# Altium PCB 存储物柜V1.1.PcbDoc (part 2 of 2)
Units mm, origin at the board's own origin, x right, y up, seen from the top; angles counter-clockwise.
Board outline 525.53 x 267.33 mm, 2 copper layers (Top Layer, Bottom Layer); 194 components, 171 nets, 781 pads, 690 vias.
Unrouted connection lines stored in the file: 2.
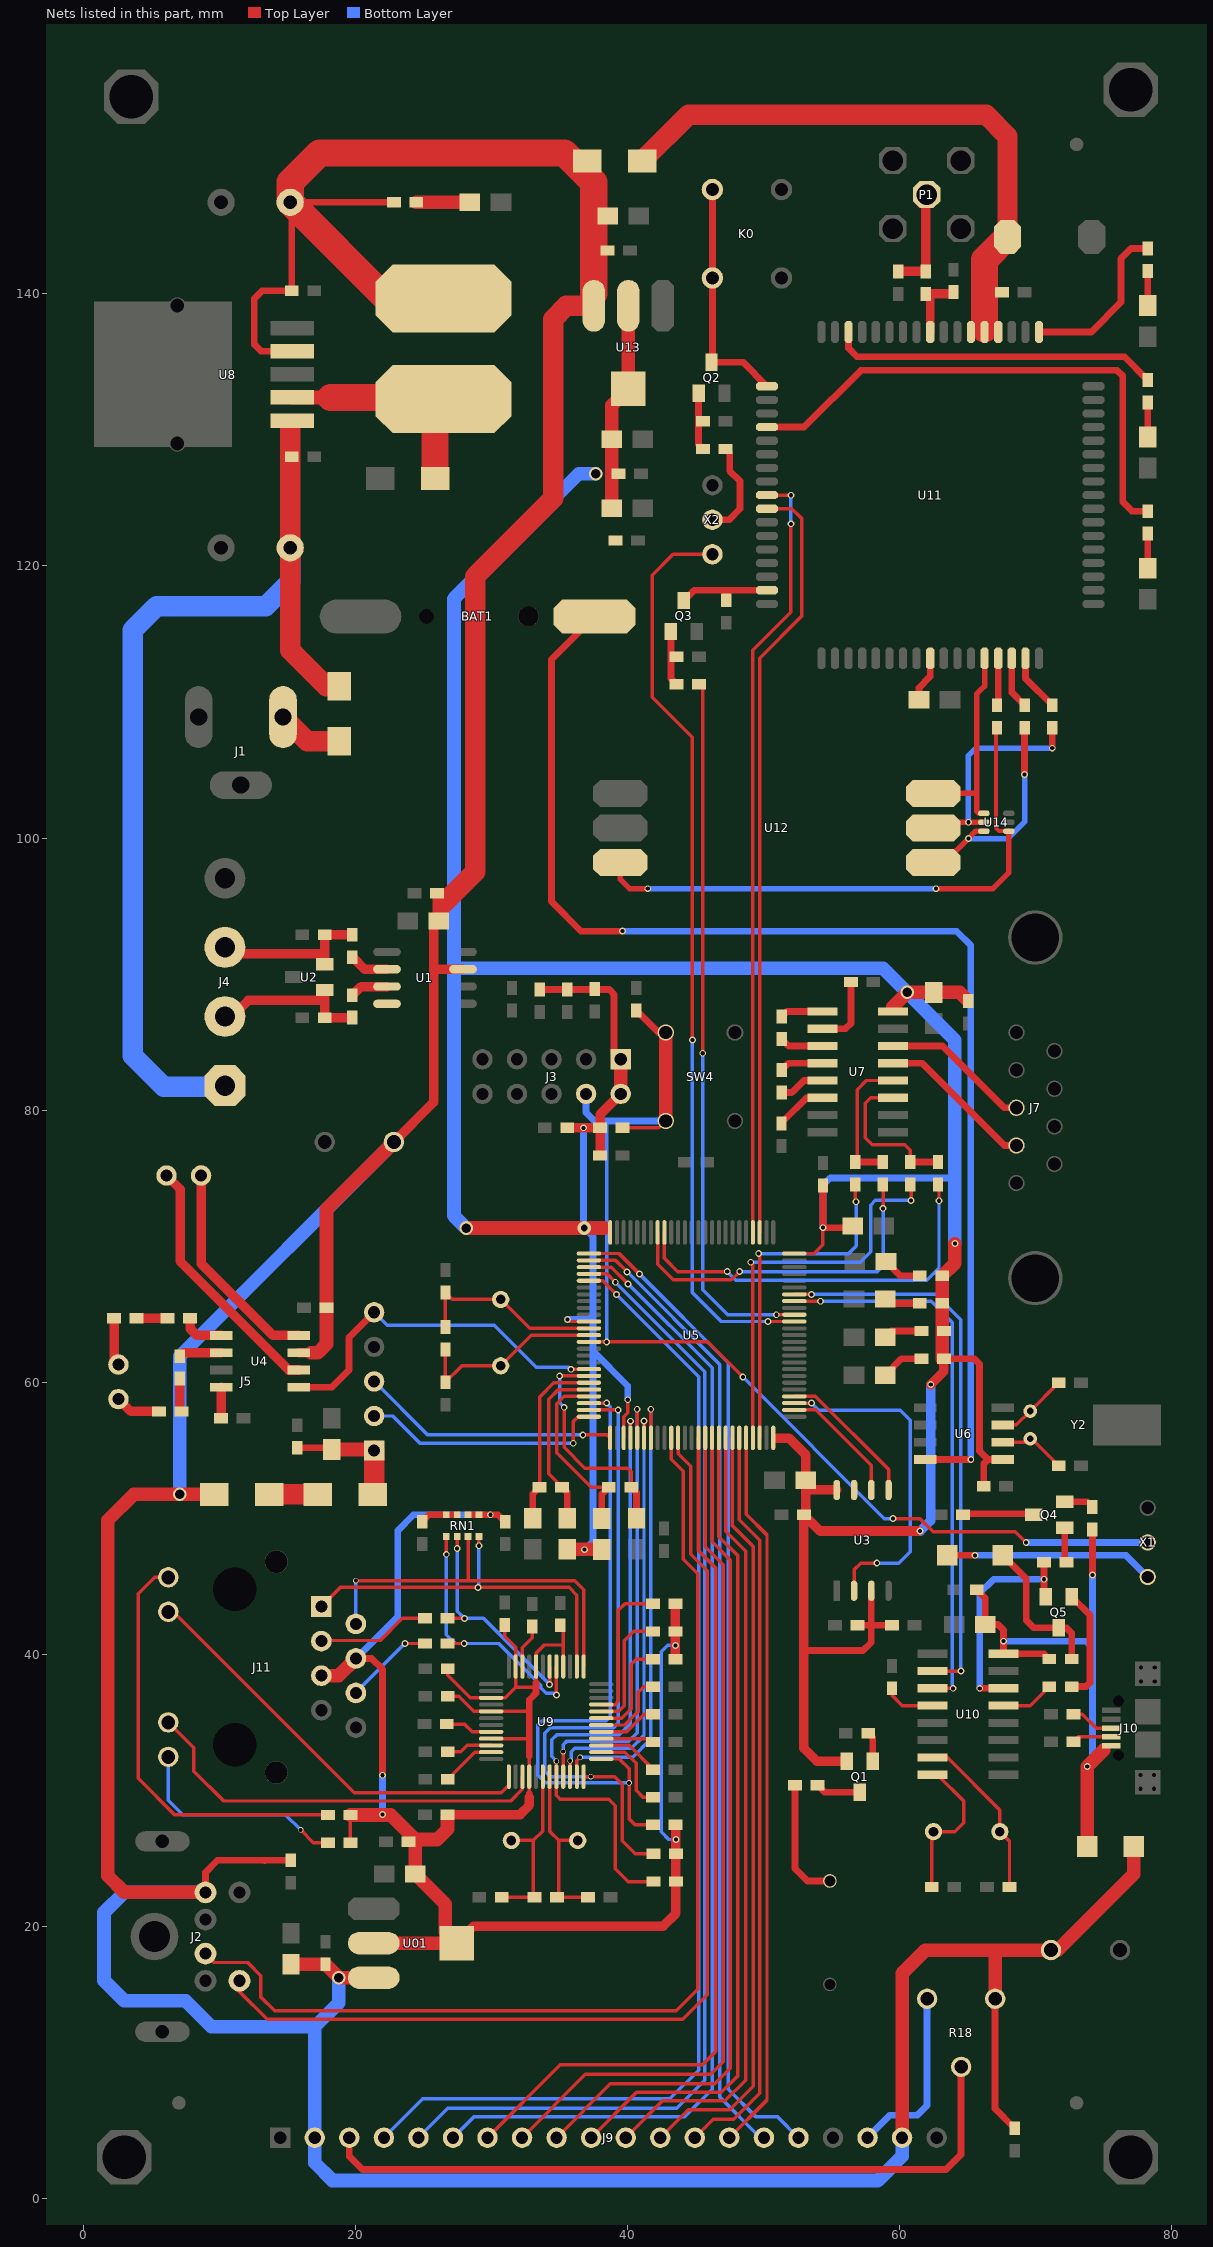
[diagram p2: the nets of this part, all layers, seen from the top]

## Via types
v1: diameter 0.5, hole 0.3, Top Layer to Bottom Layer, tented both sides, 676 vias
v2: diameter 0.4, hole 0.3, Top Layer to Bottom Layer, tented both sides, 8 vias
v3: diameter 1, hole 0.7, Top Layer to Bottom Layer, tented both sides, 5 vias
v4: diameter 1, hole 0.5, Top Layer to Bottom Layer, tented both sides, 1 vias

## Nets (pads, with @x,y where several pads share a name; then routed paths per layer and width w, separated by ;. In a path a pad name is that pad's centre, name@x,y a point inside that pad or via, vN(x,y) a via of type N, cw(c..) or ccw(c..) an arc to the next point about the centre after c; other vN are vias at no path point) (continued)
NET+3.3V: C03.1 C004.1 C04.1 C39.1 C41.1 C42.1 C46.1 C66.1 J11.4 J11.5 R31.1 R33.1 R35.1 R42.1 R46.1 R48.1 R50.1 R51.1 RN1.1 RN1.3 U01.2 U01.4 U9.4 U9.8 U9.11 U9.15 U9.17 U9.21 U9.28 | length 150.5
  Top Layer w0.254: R51.1@19.61,26.14 R50.1@19.61,28.172 ; C41.1@26.772,36.891 27.585,36.891 28.689,35.787 U9.17@29.961,35.787 32.761,35.787 ; C66.1@26.772,38.923 26.772,38.432 28.418,36.787 U9.15@29.961,36.787 30.987,36.787 31.761,37.561 U9.11@31.761,39.087 31.761,40.512 30.963,41.31 C39.1@30.963,42.149 ; U9.21@29.961,33.787 32.761,33.787 ; 31.763,37.56 33.221,37.56 ; 32.761,29.746 U9.28@32.761,30.987 32.761,32.5 ; 33.261,37.9 U9.8@33.261,39.087 33.261,40.061 33.868,40.668 35.261,40.668 ; U9.4@35.261,39.087 35.261,40.668 ; C46.1@35.261,42.091 35.261,40.668
  Top Layer w0.5: J11.4@20.016,39.683 21.178,39.683 21.971,38.89 v1(21.971,31.092) ; RN1.3@28.264,50.244 RN1.1@29.064,50.244 v1(29.9,50.244) 30.48,50.244 C004.1@30.988,49.736 ; 32.761,29.492 32.761,29.746 ; 32.761,32.5 32.761,33.787 32.761,35.787 32.761,36.625 33.261,37.125 33.261,37.9
  Top Layer w0.7: C42.1@26.75,28.2 32.083,28.2 32.761,28.878 32.761,29.492 ; U01.4@27.43,18.747 28.676,19.993 42.61,19.993 43.55,20.932 R48.1@43.55,23.276 R46.1@43.55,25.308 v1(43.55,26.368) R42.1@43.55,27.403 ; R35.1@43.511,39.932 v1(43.511,40.643) R33.1@43.511,41.666 R31.1@43.511,43.698
  Top Layer w1: J11.5@17.476,38.413 18.746,38.413 J11.4@20.016,39.683 ; R50.1@19.61,28.172 22.58,28.172 C04.1@24.214,26.538 ; U01.2@21.334,18.747 U01.4@27.43,18.747 26.594,19.584 26.594,21.618 C03.1@24.384,23.828 24.384,26.368 26,26.368 26.75,27.118 C42.1@26.75,27.968
  Bottom Layer w0.254: v1(43.511,40.643) 42.943,40.643 42.461,40.161 42.461,26.939 43.032,26.368 v1(43.55,26.368) v1@43.603,26.368
  Bottom Layer w0.5: J11.4@20.016,39.683 23.1,42.767 23.1,49.1 24.244,50.244 29.444,50.244 ; v1(21.971,28.197) v1(21.971,31.092)
NET_CS: R48.2 U5.29 U9.32 | length 46.6
  Top Layer w0.254: v2(34.761,32.123) U9.32@34.761,30.987 34.761,29.613 35.053,29.322 38.609,29.322 39.091,28.839 39.091,24.216 40.031,23.276 R48.2@41.899,23.276 R48.2@42.089,23.276 ; U5.29@40.204,55.902 v1(40.204,57.123)
  Bottom Layer w0.254: v2(34.761,32.123) 34.408,32.476 34.408,33.692 34.8,34.084 39.38,34.084 40.196,34.9 ; 40.204,34.9 v1(40.204,57.123)
NET_INT: R46.2 U5.24 U9.36 | length 47.3
  Top Layer w0.254: U9.36@36.761,30.987 v2(37.287,30.987) 39.052,30.987 39.599,30.439 39.599,26.274 40.565,25.308 R46.2@41.899,25.308 R46.2@42.089,25.308 ; U5.24@37.154,57.952 v1(39.3,57.952)
  Bottom Layer w0.254: v2(37.287,30.987) 34.313,30.987 33.9,31.4 33.9,34.192 34.3,34.592 38.958,34.592 39.3,34.934 v1(39.3,57.952)
NET_RST: R42.2 U5.23 U9.37 | length 49.4
  Top Layer w0.254: U5.23@37.154,58.452 v1(38.456,58.452) ; U9.37@38.793,32.287 U9.37@38.061,32.287 39.378,32.287 40.107,31.557 v2(40.107,30.534) 40.107,27.874 40.539,27.442 R42.2@41.86,27.442
  Bottom Layer w0.254: v1(38.456,58.452) 38.71,58.198 38.71,35.385 38.425,35.1 33.7,35.1 33.392,34.792 33.392,31.108 33.966,30.534 v2(40.107,30.534)
NetB1_1: B1.1 R20.1 | length 8.6
  Top Layer w0.5: R20.1@52.299,30.356 52.299,24.234 53.213,23.32 B1.1@54.432,23.32
NetBAT1_1: BAT1.1 U6.8 | length 95.6
  Top Layer w0.5: BAT1.1@37.558,116.284 34.392,113.118 34.392,95.329 36.576,93.145 v1@39.599,93.145 ; U6.8@61.864,54.308 v1(65.227,54.308)
  Bottom Layer w0.5: v1@39.624,93.145 64.186,93.145 65.227,92.103 v1(65.227,54.308)
  other v1: 39.624,93.17
NetC001_1: C001.1 J11.3 | length 8.3
  Top Layer w0.254: J11.3@17.476,40.953 17.523,41 21.8,41 23.424,42.624 C001.1@25.1,42.624
NetC002_1: C002.1 J11.6 | length 6.6
  Top Layer w0.254: v1(23.62,40.78) C002.1@25.1,40.78
  Bottom Layer w0.254: J11.6@20.016,37.143 20.016,37.176 v1(23.62,40.78)
NetC003_1: C003.1 RN1.5 RN1.7 | length 2.8
  Top Layer w0.5: C003.1@24.892,49.736 25.4,50.244 RN1.7@26.664,50.244 RN1.5@27.464,50.244
NetC5_1: C5.1 J4.2 R5.1 U2.1 | length 11.5
  Top Layer w0.7: J4.2@10.85,86.805 12.12,88.075 17.63,88.075 17.73,87.975 ; U2.1@17.73,88.827 17.73,87.975 ; R5.1@19.762,86.795 C5.1@17.73,86.795 17.73,87.975
NetC9_1: C9.1 J4.3 R6.1 U2.2 | length 11.2
  Top Layer w0.7: J4.3@10.85,91.885 11.26,91.475 17.73,91.475 ; U2.2@17.73,90.732 17.73,91.475 ; R6.1@19.762,92.891 C9.1@17.73,92.891 17.73,91.475
NetC13_2: C13.2 C16.2 D1.2 J5.1 | length 8.9
  Top Layer w0.5: C16.2@15.698,55.172 18.111,55.172 C13.2@18.238,55.045
  Top Layer w1: C13.2@18.238,55.045 21.28,55.045 J5.1@21.358,54.967
  Top Layer w1.5: D1.2@21.358,51.829 J5.1@21.358,54.967
NetC14_1: C14.1 L1.2 U5.20 | length 12.9
  Top Layer w0.254: C14.1@33.528,52.276 33.528,58.905 34.575,59.952 U5.20@36.91,59.952
  Top Layer w0.5: L1.2@33.02,49.99 33.02,51.768 C14.1@33.528,52.276
NetC14_2: C14.2 L2.2 U5.21 | length 12.6
  Top Layer w0.254: C14.2@35.179,52.276 34.188,53.267 34.188,58.728 34.913,59.452 U5.21@37.154,59.452
  Top Layer w0.5: C14.2@35.179,52.276 35.56,51.895 L2.2@35.56,49.99
NetC17_2: C17.2 R15.2 | length 2.3
  Top Layer w0.7: C17.2@3.887,64.697 R15.2@6.173,64.697
NetC18_2: C18.2 R16.2 | length 2.5
  Top Layer w0.7: R16.2@7.062,60.252 7.062,57.966 C18.2@7.189,57.839
NetC19_1: C19.1 U4.4 | length 2
  Top Layer w0.7: C19.1@10.11,57.585 U4.4@10.11,59.617
NetC20_1: C20.1 L3.1 U5.22 | length 13.6
  Top Layer w0.254: U5.22@37.154,58.952 35.327,58.952 34.773,58.397 34.773,54.816 37.313,52.276 C20.1@38.608,52.276
  Top Layer w0.5: L3.1@38.1,49.97 38.1,51.768 C20.1@38.608,52.276
NetC20_2: C20.2 L4.2 U5.19 | length 16.8
  Top Layer w0.254: v1@35,60.452 U5.19@37.154,60.452 ; v1(35.331,58.143) 35.331,55.197 36.855,53.673 40.005,53.673 40.259,53.419 C20.2@40.259,52.276
  Top Layer w0.5: C20.2@40.259,52.276 40.64,51.895 L4.2@40.64,49.99
  Bottom Layer w0.254: v1(35,60.455) 35,58.475 v1(35.331,58.143)
NetC25_2: C25.2 U6.2 Y2.2 | length 5.1
  Top Layer w0.254: U6.2@67.564,55.578 69.342,55.578 Y2.2@69.596,55.832 69.701,55.832 C25.2@71.689,53.844
NetC26_2: C26.2 U6.3 Y2.1 | length 5.4
  Top Layer w0.254: U6.3@67.564,56.848 68.58,56.848 Y2.1@69.596,57.864 71.672,59.94 C26.2@71.689,59.94
NetC31_1: C31.1 U7.1 | length 3.1
  Top Layer w0.5: C31.1@51.329,86.871 51.71,87.252 U7.1@54.317,87.252
NetC31_2: C31.2 U7.3 | length 3.2
  Top Layer w0.5: C31.2@51.329,85.22 51.837,84.712 U7.3@54.317,84.712
NetC32_1: C32.1 U7.2 | length 5.3
  Top Layer w0.5: U7.2@54.317,85.982 56.028,85.982 56.409,86.363 C32.1@56.409,89.411
NetC34_1: C34.1 U7.6 | length 3.7
  Top Layer w0.5: C34.1@51.329,79.251 51.481,79.251 53.132,80.902 U7.6@54.317,80.902
NetC37_1: C37.1 U7.5 | length 3.4
  Top Layer w0.5: C37.1@51.329,81.283 52.065,81.283 52.954,82.172 U7.5@54.317,82.172
NetC37_2: C37.2 U7.4 | length 3.2
  Top Layer w0.5: C37.2@51.329,82.934 51.837,83.442 U7.4@54.317,83.442
NetC47_2: C47.2 Q3.3 U11.16 | length 7.7
  Top Layer w0.5: Q3.3@44.335,117.111 44.062,117.384 44.889,118.211 47.3,118.211 ; C47.2@47.244,117.475 47.244,118.155 47.3,118.211 ; U11.16@50.242,118.211 47.3,118.211
NetC48_1: C48.1 P1.1 R34.1 | length 7.7
  Top Layer w0.5: P1.1@61.926,147.247 P1.1@61.982,147.303
  Top Layer w0.7: C48.1@59.894,141.659 R34.1@61.926,141.659 P1.1@61.926,147.247
NetC49_2: C49.2 U9.20 | length 3.5
  Top Layer w0.254: C49.2@26.701,34.859 27.992,34.859 28.564,34.287 U9.20@29.961,34.287
NetC50_1: C50.1 U11.26 | length 3.4
  Top Layer w0.5: C50.1@61.418,110.163 61.418,111.043 62.242,111.867 U11.26@62.242,113.211
NetC51_1: C51.1 R34.2 U11.60 | length 5
  Top Layer w0.6: R34.2@61.926,140.008 62.242,139.692 U11.60@62.242,137.211
  Top Layer w0.7: R34.2@61.926,140.008 63.831,140.008 C51.1@63.958,140.135
NetC52_1: C52.1 U9.22 | length 3.4
  Top Layer w0.254: C52.1@26.772,32.827 27.738,32.827 28.197,33.287 U9.22@29.961,33.287
NetC56_1: C56.1 C57.1 D8.2 U11.55 U11.56 U11.57 | length 43.8
  Top Layer w1.5: D8.2@41.084,149.787 44.472,153.175 66.35,153.175 67.922,151.603 C56.1@67.922,144.199
  Top Layer w2: U11.56@66.242,137.416 66.242,142.519 C56.1@67.922,144.199
NetC59_2: C59.2 U10.8 Y5.1 | length 11.3
  Top Layer w0.254: C59.2@62.357,22.88 62.357,26.817 Y5.1@62.484,26.944 64.044,26.944 64.7,27.6 64.7,29.2 62.765,31.135 U10.8@62.424,31.135
NetC60_2: C60.2 R47.1 U9.30 Y4.1 | length 13.2
  Top Layer w0.254: C60.2@30.735,22.133 R47.1@33.148,22.133 33.072,22.21 33.072,26.299 ; Y4.1@31.446,26.299 33.072,26.299 ; U9.30@33.761,30.987 33.761,26.989 33.072,26.299
NetC61_2: C61.2 R47.2 U9.31 Y4.2 | length 12.9
  Top Layer w0.254: U9.31@34.261,30.987 34.261,26.959 34.922,26.299 ; Y4.2@36.326,26.299 34.922,26.299 ; C61.2@37.085,22.133 R47.2@34.799,22.133 34.922,22.256 34.922,26.299
NetC63_2: C63.2 U10.4 | length 3.8
  Top Layer w0.254: C63.2@59.436,37.485 59.436,36.964 60.185,36.215 U10.4@62.424,36.215
NetC64_1: C64.1 U10.7 Y5.2 | length 12.5
  Top Layer w0.254: U10.7@62.424,32.405 63.495,32.405 67.364,28.536 Y5.2@67.364,26.944 68.072,26.236 C64.1@68.072,22.88
NetD1_1: D1.1 D2.2 | length 3.6
  Top Layer w1.5: D2.2@13.652,51.743 D1.1@17.222,51.743
NetD3_1: D3.1 J1.1 | length 4.9
  Top Layer w1.5: J1.1@14.659,108.893 16.437,107.115 D3.1@18.796,107.115
NetD4_1: D4.1 R25.1 | length 2.5
  Top Layer w0.5: D4.1@78.232,119.84 R25.1@78.232,122.38
NetD5_1: D5.1 R29.1 | length 2.5
  Top Layer w0.5: D5.1@78.232,129.492 R29.1@78.232,132.032
NetD6_2: D6.2 Q5.3 R32.1 | length 11.1
  Top Layer w0.5: D6.2@67.584,47.264 69.3,45.548 69.3,42.5 69.87,41.93 Q5.3@71.691,41.93 72.27,41.93 72.644,41.556 R32.1@72.644,39.644
NetD7_2: D7.2 L5.1 U8.2 | length 17
  Top Layer w1: U8.2@15.338,132.391 18.166,132.391
  Top Layer w2: 18.166,132.391 26.338,132.391 L5.1@26.462,132.267 25.844,131.649 D7.2@25.844,126.675
NetD9_1: D9.1 R44.1 | length 2.5
  Top Layer w0.5: D9.1@78.232,139.144 R44.1@78.232,141.684
NetJ6_1: J6.1 U4.8 | length 16.3
  Top Layer w0.7: J6.1@8.586,75.184 J6.1@8.586,75.619 ; J6.1@8.636,75.184 8.636,68.711 13.92,63.427 U4.8@15.81,63.427
NetJ6_2: J6.2 U4.6 | length 18.8
  Top Layer w0.7: J6.2@6.096,75.184 7.1,74.18 7.1,68.87 9.675,66.294 ; 9.675,66.322 9.675,66.294 ; U4.6@15.81,60.887 15.083,60.887 9.675,66.294
NetJ9_3: J9.3 R18.2 | length 53.7
  Top Layer w0.5: J9.3@19.536,4.448 19.536,3.064 20.5,2.1 63.4,2.1 64.516,3.216 R18.2@64.516,9.652
NetJ9_18: J9.18 R18.3 | length 13.2
  Bottom Layer w0.5: J9.18@57.636,4.448 59.288,6.1 61.3,6.1 62.016,6.816 R18.3@62.016,14.652
NetJ10_2: J10.2 R49.2 | length 2.9
  Top Layer w0.254: R49.2@72.771,33.548 73.137,33.914 J10.2@75.557,33.914
NetJ10_3: J10.3 R52.2 | length 3.2
  Top Layer w0.254: R52.2@72.771,35.58 73.42,35.58 74.436,34.564 J10.3@75.557,34.564
NetJ11_9: J11.9 R50.2 | length 31.7
  Top Layer w0.254: J11.9@6.226,45.643 5.229,45.643 4.013,44.427 4.013,30.864 6.705,28.172 R50.2@17.959,28.172 R50.2@17.603,28.172
NetJ11_10: J11.10 U9.25 | length 31.4
  Top Layer w0.254: J11.10@6.226,43.107 6.593,43.107 19.9,29.8 30.7,29.8 31.261,30.361 U9.25@31.261,30.987
NetJ11_11: J11.11 U9.27 | length 30.7
  Top Layer w0.254: J11.11@6.226,34.979 8.1,33.105 8.1,31.4 10.3,29.2 12.005,29.2 31.4,29.2 32.261,30.061 U9.27@32.261,30.987
NetJ11_12: J11.12 R51.2 | length 16.2
  Top Layer w0.254: v2(15.951,27.079) 16.891,26.14 R51.2@17.959,26.14
  Bottom Layer w0.254: J11.12@6.226,32.443 6.226,29.261 7.29,28.197 14.834,28.197 v2(15.951,27.079)
NetLED1_1: LED1.1 R9.1 | length 3.2
  Top Layer w0.5: LED1.1@58.928,60.5 60.146,61.718 R9.1@61.604,61.718
NetLED2_1: LED2.1 R10.1 | length 2.9
  Top Layer w0.5: LED2.1@58.928,63.3 59.378,63.75 R10.1@61.604,63.75
NetLED3_1: LED3.1 R11.2 | length 2.7
  Top Layer w0.5: LED3.1@58.928,66.1 59.246,65.782 R11.2@61.477,65.782
NetLED4_1: LED4.1 R12.2 | length 2.9
  Top Layer w0.5: LED4.1@58.985,68.872 60.043,67.814 R12.2@61.477,67.814
NetLED5_1: LED5.1 R45.2 | length 3.9
  Top Layer w1: R45.2@24.461,146.739 LED5.1@28.398,146.739
NetQ1_1: Q1.1 R19.1 | length 2.2
  Top Layer w0.5: R19.1@57.683,34.191 58.015,33.859 Q1.1@58.015,32.131
NetQ1_3: Q1.3 R20.2 | length 3.3
  Top Layer w0.5: R20.2@53.95,30.356 54.46,29.845 Q1.3@57.063,29.845
NetQ2_1: Q2.1 R21.2 R22.2 | length 4.2
  Top Layer w0.5: Q2.1@45.212,132.692 45.212,128.934 R21.2@45.543,128.603
NetQ3_1: Q3.1 R23.2 R24.2 | length 4.1
  Top Layer w0.5: Q3.1@43.18,115.184 43.18,111.714 R23.2@43.599,111.295
NetQ4_1: Q4.1 R30.2 | length 2.6
  Top Layer w0.5: Q4.1@72.136,49.296 72.136,46.883 R30.2@72.263,46.756
NetQ4_2: Q4.2 R27.1 | length 2.2
  Top Layer w0.5: Q4.2@72.136,51.201 73.787,51.201 R27.1@74.168,50.82
NetQ4_3: Q4.3 R28.2 | length 5.2
  Top Layer w0.5: R28.2@64.643,50.312 69.786,50.312 Q4.3@69.85,50.249
NetQ5_1: Q5.1 R39.1 | length 8.4
  Top Layer w0.5: R39.1@72.644,37.612 73.712,37.612 74,37.9 74,42.86 Q5.1@72.644,44.216
NetQ5_2: Q5.2 R30.1 U10.14 | length 16.5
  Top Layer w0.5: v1(65.885,37.485) U10.14@67.624,37.485 ; R30.1@70.612,46.756 v1(70.612,45.5) 70.612,44.343 Q5.2@70.739,44.216
  Bottom Layer w0.5: v1(65.885,37.485) 65.885,44.476 66.909,45.5 v1(70.612,45.5)
NetR5_2: R5.2 U1.7 | length 2.8
  Top Layer w0.7: R5.2@19.762,88.446 20.397,89.081 U1.7@22.302,89.081
NetR6_2: R6.2 U1.6 | length 2.9
  Top Layer w0.7: R6.2@19.762,91.24 20.651,90.351 U1.6@22.302,90.351
NetR15_1: R15.1 U4.1 | length 3.3
  Top Layer w0.7: R15.1@7.824,64.697 7.824,63.935 8.332,63.427 U4.1@10.11,63.427
NetR16_1: R16.1 U4.2 | length 3.2
  Top Layer w0.7: R16.1@7.062,61.903 7.316,62.157 U4.2@10.11,62.157
NetR21_1: R21.1 X2.2 | length 7.2
  Top Layer w0.5: X2.2@46.228,123.396 47.447,123.396 48.26,124.209 48.26,126.24 47.5,127 47.5,128.297 R21.1@47.194,128.603
NetR25_2: R25.2 U11.4 | length 39.4
  Top Layer w0.5: U11.4@50.242,130.211 52.967,130.211 57.141,134.385 75.981,134.385 76.403,133.962 76.403,124.691 77.064,124.031 R25.2@78.232,124.031
NetR26_2: R26.2 U9.10 | length 3.2
  Top Layer w0.254: U9.10@32.261,39.087 32.261,40.475 32.995,41.209 R26.2@32.995,42.022
NetR29_2: R29.2 U11.66 | length 24.2
  Top Layer w0.5: U11.66@56.242,137.211 56.242,136.013 56.871,135.385 76.53,135.385 R29.2@78.232,133.683
NetR31_2: R31.2 U9.45 | length 10.8
  Top Layer w0.254: U9.45@38.061,36.287 39.071,36.287 39.32,36.535 39.32,43.215 39.803,43.698 R31.2@41.86,43.698
NetR33_2: R33.2 U9.44 | length 9.7
  Top Layer w0.254: U9.44@38.061,35.787 39.333,35.787 39.752,36.205 39.752,40.98 40.438,41.666 R33.2@41.86,41.666 41.225,41.666
NetR35_2: R35.2 U9.43 | length 7.9
  Top Layer w0.254: U9.43@38.061,35.287 39.57,35.287 40.26,35.976 40.26,39.253 40.641,39.634 R35.2@41.86,39.634 R35.2@41.479,39.634
NetR36_2: R36.2 U9.42 | length 6.2
  Top Layer w0.254: U9.42@38.061,34.787 39.781,34.787 40.387,35.392 40.59,35.595 40.768,35.773 40.768,37.196 41.174,37.602 R36.2@41.86,37.602 R36.2@41.61,37.352
NetR37_2: R37.2 U9.41 | length 5.9
  Top Layer w0.254: 39.587,34.287 U9.41@38.061,34.287 39.942,34.287 41.225,35.57 R37.2@41.86,35.57
NetR38_2: R38.2 U9.40 | length 5.2
  Top Layer w0.254: 39.325,33.787 U9.40@38.061,33.787 41.611,33.787 R38.2@41.86,33.538
NetR39_2: R39.2 U10.13 | length 3.9
  Top Layer w0.254: U10.13@67.624,36.215 69.596,36.215 R39.2@70.993,37.612
NetR40_2: R40.2 U9.39 | length 4.6
  Top Layer w0.254: U9.39@38.061,33.287 40.105,33.287 41.86,31.531 R40.2@41.86,31.506
NetR41_2: R41.2 U9.38 | length 6.3
  Top Layer w0.254: U9.38@38.061,32.787 39.792,32.787 40.615,31.963 40.615,29.982 41.123,29.474 R41.2@41.86,29.474
NetR43_1: R43.1 U9.23 | length 4
  Top Layer w0.254: R43.1@26.772,30.795 28.764,32.787 U9.23@29.961,32.787
NetR44_2: R44.2 U11.52 | length 12.4
  Top Layer w0.5: U11.52@70.242,137.211 74.089,137.211 76.276,139.398 76.276,142.598 77.013,143.335 R44.2@78.232,143.335
NetR53_1: R53.1 U12.1 U14.1 | length 42.3
  Top Layer w0.3: R53.1@67.154,108.111 67.072,108.029 67.072,100.753 67.314,100.511 U14.1@68.022,100.511
  Top Layer w0.4: U12.1@39.466,98.201 39.466,96.959 40.15,96.275 v1(41.478,96.275) ; v1(62.662,96.275) 66.85,96.275 68.022,97.447 U14.1@68.022,100.511 68.022,100.247
  Bottom Layer w0.4: v1(41.478,96.275) v1(62.662,96.275)
NetR54_1: R54.1 U12.5 U14.5 | length 18
  Top Layer w0.4: U12.5@62.466,100.741 U12.5@64.116,100.741 ; U12.5@62.75,101.025 U12.5@62.886,101.161 ; U12.5@62.85,101.125 U12.5@62.886,101.161 ; U14.5@66.193,101.161 v1(65.05,101.161) U12.5@62.886,101.161
  Top Layer w0.5: v1(71.218,106.607) R54.1@71.218,108.111
  Bottom Layer w0.4: v1(65.05,101.161) 65.05,106.05 65.607,106.607 v1(71.218,106.607)
NetR55_1: R55.1 U12.4 U14.6 | length 16.4
  Top Layer w0.4: U12.4@62.466,98.201 63.276,98.201 65.043,99.968 65.586,100.511 U14.6@66.193,100.511
  Top Layer w0.5: v1(69.186,104.675) R55.1@69.186,108.111
  Bottom Layer w0.4: v1(65.05,99.961) 67.961,99.961 69.186,101.186 v1(69.186,104.675) v1@69.186,104.814
OSC_IN: C7.1 R7.1 U5.12 Y1.1 | length 14.2
  Top Layer w0.254: R7.1@26.601,64.046 C7.1@26.601,66.586 27.109,66.078 Y1.1@30.665,66.078 32.791,63.952 U5.12@37.154,63.952
OSC_OUT: C10.1 R7.2 U5.13 Y1.2 | length 14.4
  Top Layer w0.254: R7.2@26.601,62.395 C10.1@26.601,59.982 27.817,61.198 Y1.2@30.665,61.198 32.919,63.452 U5.13@37.154,63.452
PA2_USART2_TX: J5.2 U5.25 | length 18.8
  Top Layer w0.254: J5.2@21.358,57.507 J5.2@21.413,57.452 ; v1(36,55.5) 36,57.1 36.352,57.452 U5.25@37.154,57.452
  Bottom Layer w0.254: J5.2@21.358,57.507 22.734,57.507 24.727,55.514 v1@36,55.514 ; J5.2@21.413,57.452 J5.2@21.661,57.204
PA3_USART2_RX: J5.3 U5.26 | length 19.7
  Top Layer w0.254: v1(36.7,56.111) 38.495,56.111 U5.26@38.704,55.902 U5.26@38.704,56.498
  Bottom Layer w0.254: J5.3@21.358,60.047 25.294,56.111 v1(36.7,56.111)
"PA9 USART1_TX": U5.68 U10.3 | length 40.7
  Top Layer w0.254: U5.68@52.254,65.952 v1@54.178,65.952 ; U10.3@62.424,37.485 v1(63.932,37.485)
  Bottom Layer w0.254: v1(54.178,65.941) 62.306,65.941 63.869,64.378 63.869,37.548 63.904,37.513 v1(63.932,37.485)
"PA10  USART1_RX": U5.69 U10.2 | length 40.9
  Top Layer w0.254: U5.69@52.254,66.452 v1@53.518,66.452 ; U10.2@62.424,38.755 v1(64.5,38.755)
  Bottom Layer w0.254: v1(53.518,66.449) 62.636,66.449 64.5,64.586 v1(64.5,38.755)
"PB6  USART1_TX": R01.2 U5.92 | length 29.2
  Top Layer w0.254: U5.92@42.704,71.002 42.704,69.116 43.695,68.126 v1(47.32,68.126) ; v1(62.89,73.333) R01.2@62.89,74.457
  Bottom Layer w0.254: v1(47.32,68.126) 47.955,67.491 62.001,67.491 62.89,68.38 v1(62.89,73.333)
PB7_USART1_RX: R03.2 U5.93 | length 25.8
  Top Layer w0.254: U5.93@42.204,71.002 42.204,68.67 43.358,67.516 47.625,67.516 v1(48.235,68.126) ; v1(58.776,72.774) R03.2@58.776,74.508
  Bottom Layer w0.254: v1(48.235,68.126) 58.344,68.126 58.776,68.557 v1(58.776,72.774)
"PB10 USART3_TX": R02.2 U5.47 | length 29.8
  Top Layer w0.254: v1(49.047,68.811) 49.204,68.655 U5.47@49.204,55.902 ; R02.2@60.784,74.532 60.833,74.483 v1(60.833,73.358)
  Bottom Layer w0.254: v1(49.047,68.811) 57.099,68.811 57.861,69.573 57.861,73.002 58.217,73.358 v1(60.833,73.358)
PB11_USART3_RX: R04.2 U5.48 | length 25.5
  Top Layer w0.254: v1(49.632,69.446) 49.704,69.374 U5.48@49.704,55.902 ; R04.2@56.72,74.532 56.72,73.331 v1(56.794,73.256)
  Bottom Layer w0.254: v1(49.632,69.446) 56.236,69.446 56.794,70.005 v1(56.794,73.256)
PC0: J9.7 U5.39 | length 65.1
  Top Layer w0.254: J9.7@29.696,4.448 35.048,9.8 45.5,9.8 46.482,10.782 46.482,46.332 45.204,47.61 U5.39@45.204,55.902
PC1: J9.8 U5.40 | length 66.2
  Top Layer w0.254: J9.8@32.236,4.448 36.888,9.1 45.4,9.1 46.1,9.1 47.041,10.041 47.041,26.343 ; U5.40@45.704,55.902 45.704,47.898 47.041,46.561 47.041,26.343 ; 47.041,23.65 47.041,26.343
PC2: J9.9 U5.41 | length 63.8
  Top Layer w0.254: J9.9@34.776,4.448 38.728,8.4 46.4,8.4 47.549,9.549 47.549,23.574 ; U5.41@46.204,55.902 46.204,48.261 47.549,46.917 47.549,23.574 ; 47.549,21.618 47.549,23.574
PC3: J9.10 U5.42 | length 60.2
  Top Layer w0.254: J9.10@37.316,4.448 40.648,7.781 44.7,7.781 46.881,7.781 48.108,9.008 48.108,47.221 46.704,48.625 U5.42@46.704,55.902
PC4: J9.11 U5.43 | length 58.4
  Top Layer w0.254: J9.11@39.856,4.448 42.558,7.15 45.8,7.15 47.15,7.15 48.666,8.666 48.666,47.562 47.204,49.025 U5.43@47.204,55.902
PC5: J9.12 U5.44 | length 56.7
  Top Layer w0.254: J9.12@42.396,4.448 44.448,6.5 47.5,6.5 49.225,8.225 49.225,47.91 47.704,49.431 U5.44@47.704,55.902
PC6: J9.13 U5.45 | length 54.9
  Top Layer w0.254: J9.13@44.936,4.448 46.288,5.8 47.8,5.8 49.708,7.708 49.708,48.385 48.204,49.888 U5.45@48.204,55.902
PC7: J9.14 U5.46 | length 53.2
  Top Layer w0.254: J9.14@47.476,4.448 50.242,7.214 50.242,48.757 48.704,50.295 U5.46@48.704,55.902
"PC10 USART3_TX": U5.78 U11.10 | length 56.6
  Top Layer w0.254: U5.78@49.704,71.002 49.704,113.232 52.781,116.309 52.781,123.498 52.068,124.211 U11.10@50.242,124.211
"PC11 USART3_RX": U5.79 U11.9 | length 57.1
  Top Layer w0.254: 49.196,112.9 49.196,113.796 52,116.6 v1(52,123.1) ; U5.79@49.204,71.002 49.204,112.9 ; U11.9@50.242,125.211 v1@52,125.211
  Bottom Layer w0.254: v1(52,123.1) v1(52,125.2)
PE2: J9.16 U5.1 | length 73.6
  Top Layer w0.254: U5.1@37.154,69.452 39.364,69.452 v1(40.869,67.948)
  Bottom Layer w0.254: v1(40.869,67.948) 47.396,61.42 47.396,8.004 49.4,6 51.004,6 J9.16@52.556,4.448
PE3: J9.15 U5.2 | length 71.1
  Top Layer w0.254: U5.2@37.154,68.952 39.102,68.952 v1(39.954,68.1)
  Bottom Layer w0.254: v1(39.954,68.1) 46.761,61.293 46.761,7.439 49.752,4.448 J9.15@50.016,4.448
PE4: J9.6 U5.3 | length 85.7
  Top Layer w0.254: U5.3@37.154,68.452 38.79,68.452 v1(40.03,67.211)
  Bottom Layer w0.254: J9.6@27.156,4.448 28.708,6 44.2,6 46.203,8.003 46.203,15.5 46.203,61.039 v1(40.03,67.211)
PE5: J9.5 U5.4 | length 86.4
  Top Layer w0.254: U5.4@37.154,67.952 38.477,67.952 v1(39.091,67.338)
  Bottom Layer w0.254: J9.5@24.616,4.448 26.768,6.6 43.6,6.6 45.669,8.669 45.669,15.7 45.669,60.76 v1(39.091,67.338)
PE6: J9.4 U5.5 | length 87.2
  Top Layer w0.254: U5.5@37.154,67.452 38.164,67.452 v1(39.167,66.449)
  Bottom Layer w0.254: J9.4@22.076,4.448 24.928,7.3 43.1,7.3 45.212,9.412 45.212,16.3 45.212,60.404 v1(39.167,66.449)
PS_CLK: J2.5 U5.36 | length 79
  Top Layer w0.254: J2.5@11.458,15.981 11.458,15.189 13.487,13.16 29.718,13.16 ; 29.3,13.16 30.9,13.16 44.06,13.16 45.847,14.947 45.847,20.8 45.847,46.129 44.628,47.348 44.628,53.8 43.704,54.724 U5.36@43.704,55.902
PS_DAT: J2.1 U5.35 | length 80.9
  Top Layer w0.254: J2.1@8.958,17.981 9.613,17.326 12.065,17.326 13.03,16.36 13.03,14.786 14.046,13.77 43.57,13.77 45.161,15.361 45.161,19.358 45.161,45.901 44.094,46.967 44.094,53.444 43.204,54.335 U5.35@43.204,55.902
PWRKEY: K0.1 Q2.3 U11.1 | length 17.6
  Top Layer w0.5: Q2.3@46.165,134.978 Q2.3@46.185,134.978 ; Q2.3@46.178,134.985 Q2.3@46.185,134.978 ; Q2.3@46.228,135.042 K0.1@46.228,141.176 K0.1@46.228,147.676 ; Q2.3@46.276,134.887 Q2.3@46.185,134.978 ; 48.461,134.978 Q2.3@46.185,134.978 ; 48.468,134.985 U11.1@50.242,133.211
PX,Y: U1.8
R\E\A\D\Y/BUSY: J5.5 U4.5 U5.18 | length 26.8
  Top Layer w0.254: v1@35.839,60.952 U5.18@37.154,60.952
  Top Layer w0.5: U4.5@15.81,59.617 18.238,59.617 19.508,60.887 19.508,63.277 J5.5@21.358,65.127
  Bottom Layer w0.254: J5.5@21.358,65.127 22.322,64.163 30.201,64.163 33.011,61.353 33.264,61.1 35.677,61.1 v1(35.839,60.937)
RESET: C21.1 J3.4 R17.1 SW4.1 U5.14 X1.2 | length 82.7
  Top Layer w0.254: U5.14@37.154,62.952 v1(38.456,62.952) 45.89,62.952 v1(48.463,60.379) ; R17.1@39.624,78.692 42.292,78.692 SW4.1@42.8,79.2 ; v1(59.5,49.965) 61.493,49.965 62.458,49 68.5,49 v1(69.3,48.2)
  Top Layer w0.5: C21.1@40.64,87.328 42.268,85.7 SW4.1@42.5,85.7
  Top Layer w1: SW4.1@42.8,79.2 SW4.1@42.8,85.7
  Bottom Layer w0.254: v1(38.456,62.952) 38.456,79.2 ; v1(48.463,60.379) 58.877,49.965 v1(59.5,49.965)
  Bottom Layer w0.5: J3.4@36.944,81.188 36.944,79.823 37.567,79.2 38.456,79.2 42.164,79.2 ; v1(69.3,48.2) 78.22,48.2 X1.2@78.232,48.212
RESET1: D6.1 X1.1 | length 15.4
  Top Layer w0.5: D6.1@63.5,47.264 v1(65.536,47.264)
  Bottom Layer w0.5: v1(65.536,47.264) 76.64,47.264 X1.1@78.232,45.672
RXN: C002.2 RN1.8 U9.5 | length 20.6
  Top Layer w0.254: v1(26.664,47.336) RN1.8@26.664,48.644 ; C002.2@26.751,40.78 v1(27.98,40.78) ; v1(34.761,37) U9.5@34.761,39.087
  Bottom Layer w0.254: v1(26.664,47.336) 26.664,41.436 27.32,40.78 v1(27.98,40.78) 30.52,40.78 33.6,37.7 33.6,37.53 34,37.13 34.631,37.13 v1(34.761,37)
RXP: C001.2 RN1.6 U9.6 | length 17.1
  Top Layer w0.254: C001.2@26.751,42.624 v1(28,42.624) ; v1(27.464,47.764) RN1.6@27.464,48.644 ; v1(34.261,37.761) U9.6@34.261,39.087
  Bottom Layer w0.254: v1(27.464,47.764) 27.464,43.16 v1(28,42.624) 29.399,42.624 v1(34.261,37.761)
SIM900_RST: R23.1 U5.66 | length 52.5
  Top Layer w0.254: v1(45.517,84.178) R23.1@45.517,111.028 ; v1(50.927,64.952) U5.66@52.254,64.952 ; R23.1@45.517,111.028 R23.1@45.25,111.295 R23.1@45.517,111.028
  Bottom Layer w0.254: v1(45.517,84.178) 45.517,66.779 47.344,64.952 v1(50.927,64.952)
SIM_CLK: R55.2 U11.32 | length 3.8
  Top Layer w0.5: U11.32@68.242,113.211 68.242,110.706 R55.2@69.186,109.762
SIM_DATA: R53.2 U11.31 | length 3.5
  Top Layer w0.5: R53.2@67.154,109.762 67.242,109.85 U11.31@67.242,113.211
SIM_PWRKEY: U5.65 X2.1 | length 67.4
  Top Layer w0.254: v1(44.755,85.144) 44.755,107.4 41.808,110.346 41.808,119.332 43.332,120.856 X2.1@46.228,120.856 ; v1(50.317,64.452) U5.65@52.254,64.452
  Bottom Layer w0.254: v1(44.755,85.144) 44.755,66.586 46.888,64.452 v1(50.317,64.452)
SIM_RST: R54.2 U11.33 | length 4.3
  Top Layer w0.5: U11.33@69.242,113.211 69.242,111.738 R54.2@71.218,109.762
SIM_VDD: U11.30 U12.6 U14.4 | length 15.4
  Top Layer w0.4: U12.6@62.52,103.335 U12.6@62.466,103.281 65.644,103.281 ; U14.4@66.193,101.815 U14.4@66.193,101.811 65.814,101.811 65.65,101.975 65.65,110.575 66.242,111.167 U11.30@66.242,113.211
SPI1_MISO: U5.31 U9.34 | length 32
  Top Layer w0.254: U9.34@35.761,30.987 v2(35.761,32.159) ; U5.31@41.204,55.902 v1@41.204,57.122
  Bottom Layer w0.254: v2(35.761,32.159) 35.834,32.232 35.842,32.24 35.842,32.81 36.1,33.068 40.253,33.068 41.199,34.013 v1(41.199,57.127)
SPI1_MOSI: U5.32 U9.35 | length 33.6
  Top Layer w0.254: U9.35@36.261,30.987 36.261,32.161 v2(36.5,32.4) ; U5.32@41.704,55.902 v1@41.704,58
  Bottom Layer w0.254: v2@36.5,32.423 40.37,32.423 41.707,33.759 v1@41.707,58
  other v1: 41.7,58
SPI1_SCK: U5.30 U9.33 | length 34
  Top Layer w0.254: U9.33@35.261,30.987 v2(35.261,32.826) ; U5.30@40.704,55.902 v1@40.704,58
  Bottom Layer w0.254: v2(35.261,32.826) 35.261,33.337 35.5,33.576 40.043,33.576 40.333,33.867 ; 40.337,33.863 40.704,34.23 v1@40.704,58
  other v1: 40.7,58
SPI2_MISO: U3.2 U5.53 | length 25.7
  Top Layer w0.254: U5.53@52.254,58.452 v1(53.514,58.452) ; 56.642,45.418 U3.2@56.642,44.656 56.642,46.205 57.125,46.688 v1(58.318,46.688)
  Bottom Layer w0.254: v1(53.514,58.452) 54.051,57.915 60.046,57.915 60.782,57.178 60.782,47.526 59.944,46.688 v1(58.318,46.688)
SPI2_MOSI: U3.5 U5.54 | length 10.7
  Top Layer w0.254: U5.54@52.254,58.952 53.801,58.952 59.182,53.571 U3.5@59.182,52.066
SPI2_SCK: U3.6 U5.52 | length 9.2
  Top Layer w0.254: U5.52@52.254,57.952 53.836,57.952 57.912,53.876 U3.6@57.912,52.066
SPK+: C17.1 J5.6 | length 3.5
  Top Layer w0.7: C17.1@2.236,64.697 2.236,61.609 J5.6@2.558,61.287
SPK-: C18.1 J5.7 | length 3.4
  Top Layer w0.7: J5.7@2.558,58.747 3.466,57.839 C18.1@5.538,57.839
TM_RXD: J7.2 U7.13 | length 11.6
  Top Layer w0.5: U7.13@59.517,83.442 61.647,83.442 67.692,77.397 J7.2@68.58,77.397
TM_TXD: J7.3 U7.14 | length 10.9
  Top Layer w0.5: U7.14@59.517,84.712 63.145,84.712 67.692,80.165 J7.3@68.58,80.165
TXN: J11.2 RN1.4 U9.1 | length 29.1
  Top Layer w0.254: v2(20.016,45.4) 36.1,45.4 36.761,44.739 U9.1@36.761,39.087 ; 28.264,45.4 RN1.4@28.264,48.644
  Bottom Layer w0.254: J11.2@20.016,42.223 v2(20.016,45.4)
TXP: J11.1 RN1.2 U9.2 | length 28.6
  Top Layer w0.254: J11.1@17.476,43.493 18.883,44.9 v1(29,44.9) 35.7,44.9 36.261,44.339 U9.2@36.261,39.087 ; v1(29.064,47.964) RN1.2@29.064,48.644
  Bottom Layer w0.254: v1(29,44.9) 29.064,44.964 v1(29.064,47.964)
USART_RX: R03.1 R04.1 U7.12 | length 11
  Top Layer w0.254: R04.1@56.496,76.183 R04.1@56.72,76.183 R04.1@56.871,76.333 ; R04.1@56.871,75.876 56.871,81.5 57.543,82.172 U7.12@59.517,82.172
  Top Layer w0.5: R04.1@56.72,76.183 R03.1@58.752,76.183
USART_TX: R01.1 R02.1 U7.11 | length 11.3
  Top Layer w0.254: U7.11@59.517,80.902 57.873,80.902 57.471,80.5 57.471,77.965 57.988,77.447 60.376,77.447 60.784,77.039 R02.1@60.784,76.183
  Top Layer w0.5: R02.1@60.784,76.183 R01.1@62.816,76.183
USB+5V: C54.2 C55.2 J10.1 R00.2 R27.2 R32.2 U10.16 | length 41.5
  Top Layer w0.5: C55.2@65.659,44.724 66.294,44.089 C54.2@66.294,42.184 67.217,42.184 67.624,41.777 v1(67.624,40.948) U10.16@67.624,40.025 70.612,40.025 R32.2@70.993,39.644 ; v1(74.168,45.824) R27.2@74.168,49.169
  Top Layer w1: R00.2@73.787,25.86 v1(73.787,31.727) 75.006,32.947
  Bottom Layer w0.5: v1(67.624,40.948) 73.711,40.948 74.143,40.516 ; v1(73.787,31.727) 74.168,32.108 v1(74.168,45.824)
VCC+3.3V: C4.2 C6.2 C8.2 C11.2 C12.2 C15.1 C22.1 C33.2 C35.2 C36.2 C67.1 C68.1 C69.1 J3.1 J3.2 L2.1 L3.2 Q1.2 R1.1 R2.1 R3.1 R9.2 R10.2 R11.1 R12.1 R14.1 R17.2 R58.1 U3.3 U3.7 U3.8 U5.11 U5.28 U5.50 U5.75 U5.100 U6.1 U7.16 U13.2 U13.4 | length 321.1
  Top Layer w0.254: v1@35.728,64.452 U5.11@37.154,64.452 ; 35.941,71.002 v4@36.805,71.002 ; L3.2@38.08,47.704 L3.2@38.1,47.684 ; 38.278,71.002 U5.100@38.704,71.002 ; U5.28@39.704,55.902 39.704,57.436 40.005,57.737 v1(40.005,58.7) ; U5.75@52.254,69.452 53.727,69.452 54.356,70.081 v1(54.356,71.351)
  Top Layer w0.5: R3.1@33.528,88.852 R2.1@35.56,88.852 R1.1@37.541,88.852 ; R1.1@37.592,88.903 R1.1@37.541,88.852 ; J3.1@39.484,83.728 39,84.212 39,88.5 38.648,88.852 R1.1@37.541,88.852 ; 52.959,40.262 57.302,40.262 57.912,40.871 57.912,42.116 ; C12.2@54.356,74.45 v1(54.356,71.351) 56.413,71.351 C6.2@56.54,71.478 ; R58.1@56.896,42.116 57.912,42.116 ; U3.3@57.912,44.656 57.912,42.116 ; C22.1@59.436,42.116 57.912,42.116 ; R9.2@63.255,61.718 65.462,61.718 65.862,61.318 65.862,54.943 66.497,54.308 ; C33.2@66.173,52.348 66.173,53.984 66.497,54.308 ; U6.1@67.564,54.308 66.497,54.308
  Top Layer w0.7: R14.1@35.56,78.692 v1(36.754,78.692) R17.2@37.973,78.692 ; C11.2@37.973,76.66 R17.2@37.973,78.692 ; J3.2@39.484,81.188 37.973,79.677 R17.2@37.973,78.692 ; 50.978,55.857 51.892,55.857 53.086,54.664 C4.2@53.086,52.784 ; U3.8@55.372,52.066 53.086,52.066 53.086,50.371 C8.2@52.959,50.244 ; Q1.2@56.11,32.131 53.901,32.131 52.959,33.074 52.959,40.262 C8.2@52.959,50.244 ; v1@61.358,49.05 54.153,49.05 C8.2@52.959,50.244 ; v1(62.281,59.82) 63.255,60.794 R9.2@63.255,61.718
  Top Layer w1: v3(28.118,71.326) v4(36.805,71.326) 38.278,71.326 ; L2.1@35.56,47.704 L3.2@38.08,47.704 ; C67.1@38.822,124.247 C69.1@38.822,129.327 38.822,131.805 U13.4@40.049,133.033 U13.2@40.049,139.129 ; J3.2@39.484,81.188 J3.1@39.484,83.728 ; 59.482,87.582 v3(60.549,88.649) C35.2@62.505,88.649 64.41,88.649 C36.2@64.892,88.167 ; R9.2@63.128,61.718 R11.1@63.128,65.782 R12.1@63.128,67.814 64.059,68.745 v1(64.059,70.183)
  Bottom Layer w0.5: v1(35.573,64.608) 37.198,64.608 37.44,64.849 ; v4@36.754,71.377 v1(36.754,78.692) ; v4(36.805,71.326) 37.44,70.691 37.44,64.849 ; v1(36.83,47.679) 37.44,48.288 37.44,62.284 ; 37.44,65.281 37.44,64.849 ; v1(40.005,58.7) 40.005,59.718 37.44,62.284 ; v1(54.356,71.351) 54.356,74.476 54.889,75.009 64.033,75.009 ; 37.44,62.284 37.44,64.849
  Bottom Layer w0.7: v1@61.513,49.05 62.281,49.818 v1(62.281,59.82)
  Bottom Layer w1: 27.305,90.427 58.771,90.427 v3(60.549,88.649) 64.059,85.139 v1(64.059,70.183) ; v3(28.118,71.326) 27.229,72.215 27.229,117.605 36.398,126.774 v3(37.643,126.774)
  other v1: 61.5,49.05
VCC+5V: C01.1 C1.2 C02.1 C2.2 C3.1 C23.1 C24.2 C27.1 C30.2 C53.1 C58.2 C62.1 C65.1 D2.1 D8.1 J2.4 J9.2 J9.19 L5.2 R00.1 R18.1 R45.1 U1.3 U01.3 U4.7 U8.4 U13.3 | length 389.5
  Top Layer w0.5: J2.4@8.958,22.481 8.958,23.958 9.844,24.844 13.335,24.844 ; 13.31,24.819 13.335,24.844 ; C3.1@15.24,24.844 13.335,24.844 ; U8.4@15.338,135.791 13.034,135.791 12.55,136.275 12.55,139.675 13.106,140.231 C58.2@15.303,140.231 15.303,146.626 C53.1@15.19,146.739 R45.1@22.81,146.739 ; R18.1@67.016,14.652 67.016,6.579 C30.2@68.456,5.139
  Top Layer w0.7: U4.7@15.81,62.157 16.714,62.157 ; C23.1@22.81,77.651 25.73,80.571 25.73,93.525 C1.2@26.112,93.907 25.985,94.034 C2.2@25.985,95.939 ; 25.73,90.351 U1.3@27.89,90.351
  Top Layer w1: J2.4@8.958,22.481 3,22.481 1.778,23.703 1.778,49.838 3.683,51.743 v3(7.062,51.743) D2.1@9.602,51.743 ; C01.1@15.24,17.199 C02.1@17.78,17.199 v3(18.771,16.208) U01.3@21.334,16.208 ; 16.714,62.157 17.222,62.157 17.857,62.792 C24.2@17.857,65.459 17.857,72.698 C23.1@22.81,77.651 ; J9.19@60.176,4.448 60.176,16.516 61.9,18.24 C27.1@71.12,18.24 71.628,18.24 77.216,23.828 R00.1@77.216,25.86 ; R18.1@67.016,14.652 67.016,18.056
  Top Layer w1.5: 26.441,95.177 28.778,97.513 28.778,119.23 34.519,124.971 34.519,138.153 35.494,139.129 U13.3@37.509,139.129
  Top Layer w2: C53.1@15.19,146.739 15.19,148.215 17.35,150.375 35.35,150.375 37.509,148.216 U13.3@37.509,140.035 ; C53.1@15.303,146.626 22.262,139.667 L5.2@26.462,139.667
  Bottom Layer w1: v3(7.062,51.743) 7.062,61.903 C23.1@22.81,77.651 ; J2.4@8.958,22.481 2.981,22.481 1.5,21 1.5,16 3,14.5 7.5,14.5 9.404,12.596 16.996,12.596 ; v3(18.771,16.208) 18.771,14.371 16.996,12.596 ; J9.19@60.176,4.448 60.176,3.076 58.4,1.3 18.3,1.3 16.996,2.604 J9.2@16.996,4.448 16.996,12.596
VCC+12V: C43.1 C45.2 D3.2 J4.1 U8.1 | length 75.7
  Top Layer w1.5: C43.1@15.19,121.339 15.19,113.81 17.835,111.165 D3.2@18.796,111.165 ; C43.1@15.19,121.975 U8.1@15.19,130.375
  Bottom Layer w1.5: J4.1@10.85,81.725 5.882,81.725 3.607,84.001 3.607,115.293 5.359,117.046 13.386,117.046 15.19,118.85 C43.1@15.19,121.339
pads on no net: BAT1.0 J2.2 J2.6 J2.7 J2.9 J2.S J3.8 J7.1 J7.4 J7.6 J7.7 J7.8 J7.9 J9.17 J10.0@76.082,32.564 J10.0@76.082,36.564 J10.0@78.232,33.364 J10.0@78.232,35.764 J10.4 J11.7 J11.8 U1.5 U5.6 U5.7 U5.8 U5.9 U5.15 U5.16 U5.17 U5.33 U5.34 U5.38 U5.55 U5.56 U5.67 U5.70 U5.71 U5.73 U5.80 U5.81 U5.82 U5.83 U5.84 U5.85 U5.86 U5.87 U5.88 U5.91 U5.97 U5.98 U7.7 U7.8 U7.9 U7.10 U9.7 U9.12 U9.13 U9.18 U9.24 U9.26 U9.46 U9.47 U10.9 U10.10 U10.11 U10.12 U10.15 U11.2 U11.3 U11.5 U11.6 U11.7 U11.8 U11.11 U11.12 U11.13 U11.14 U11.15 U11.17 U11.19 U11.20 U11.21 U11.22 U11.23 U11.24 U11.25 U11.27 U11.28 U11.34 U11.35 U11.36 U11.37 U11.38 U11.40 U11.41 U11.42 U11.43 U11.44 U11.47 U11.48 U11.49 U11.50 U11.51 U11.67 U11.68 U12.2 U14.3 X1.3 X2.3

## Polygon pours and split planes (outlines as drawn)
GND on Bottom Layer "Top Layer-No Net" (solid, remove dead copper, pour order 1000): 2,157 1,156 1,2 2,1 6,1 78,1 79,2 79,5 79,156 78,157
GND on Top Layer "Top Layer-No Net" (solid, remove dead copper, pour order 1001): 2,157 1,156 1,2 2,1 7,1 78,1 79,2 79,5 79,156 78,157

## Other copper
Top Layer:
  rectangle net VCC+3.3V: 38.633,121.491 39.717,123.307
  rectangle net VCC+3.3V: 36.83,130.875 43.35,136.275
  rectangle net VCC+3.3V: 36.817,123.307 39.717,132.888
  region net VCC+3.3V: 39.05,129.875 40.05,130.875 39.45,131.475 38.45,130.475
  rectangle net VCC+3.3V: 55.194,51.412 56.794,52.682

## Silkscreen, mask and mechanical layers (free items; w line width, h text height)
Top Overlay:
  circle w0.254: c23.717,29.5 r0.2
  circle w0.254: c5.6,27.6 r0.2
  rectangle: 43.663,119.789 44.704,123.879
  rectangle: 75.667,44.605 76.708,48.695
  lines w0.1: 13.4,29.3 13.4,28.8 ; 13.8,28.8 13.4,28.8 ; 14.5,29.7 14.3,29.7 ; 22.7,30.4 23.3,30.4 ; 23.3,29.8 23.3,30.4 ; 23.7,30.1 23.7,39.7 ; 74.092,34.699 74.092,40.338 ; 74.854,40.338 74.854,39.525 ; 75.692,39.525 74.854,39.525 ; 76.225,40.025 76.225,43.411 ; 76.225,40.897 74.854,39.525 ; 13.4,28.8 14.3,29.7 ; 14.3,29.7 14.902,29.7 15.494,29.7 22.6,29.7 23.3,30.4 ; 73.3,97.8 73.8,97.3 77.3,97.3 77.8,97.8 77.8,111.5 77.3,112 73.8,112 73.3,111.5 73.3,97.8
  lines w0.15: 6.2,27.5 13,27.5
  lines w1: 29.2,59.8 29.2,67.3 ; 30.1,24.9 37.6,24.9 ; 30.1,27.7 37.6,27.7 ; 32.2,59.8 32.2,67.3 ; 61.1,28.4 68.6,28.4 ; 61.2,25.6 68.7,25.6
  text "POWER" at 46.406,149.228 h1
  text "12VDC_IN" at 1.45,127.425 h2 r270
  text "20141028" at 29.5,107.4 h2 r270
  text "e_lin" at 26.2,105.6 h2 r270
  text "GND" at 13.375,98.25 h1 r270
  text "R01,R03:USART1" at 75,97.8 h1.2 r90
  text "R02,R04:USART3" at 77,97.8 h1.2 r90
  text "CANL" at 13.375,93.525 h1 r270
  text "CANH" at 13.375,88.7 h1 r270
  text "12V" at 13.375,83.025 h1 r270
  text "SPK" at 0.9,77.8 h1.5 r270
  text "Storage Cabinet V1.0" at 45.6,51.781 h2.5 r270
  text "1" at 14,11.9 h1
Mechanical 1:
  lines w0.254: 0,0 80,0 80,158 0,158 0,0

## Text inside footprints (layer, text, board x,y; h text height)
U01: Top Overlay "3" at 25.729,16.868 h1 r270; Top Overlay "1" at 25.729,21.44 h1 r270
U13: Top Overlay "3" at 38.17,134.734 h1 r180; Top Overlay "1" at 42.742,134.734 h1 r180